# Altium PCB led_project.PcbDoc (part 2 of 2)
Units mm, origin at the board's own origin, x right, y up, seen from the top; angles counter-clockwise.
Board outline 347.39 x 342.47 mm, 2 copper layers (Top Layer 1, Bottom Layer 1); 228 components, 175 nets, 826 pads, 0 vias.
Unrouted connection lines stored in the file: 396.
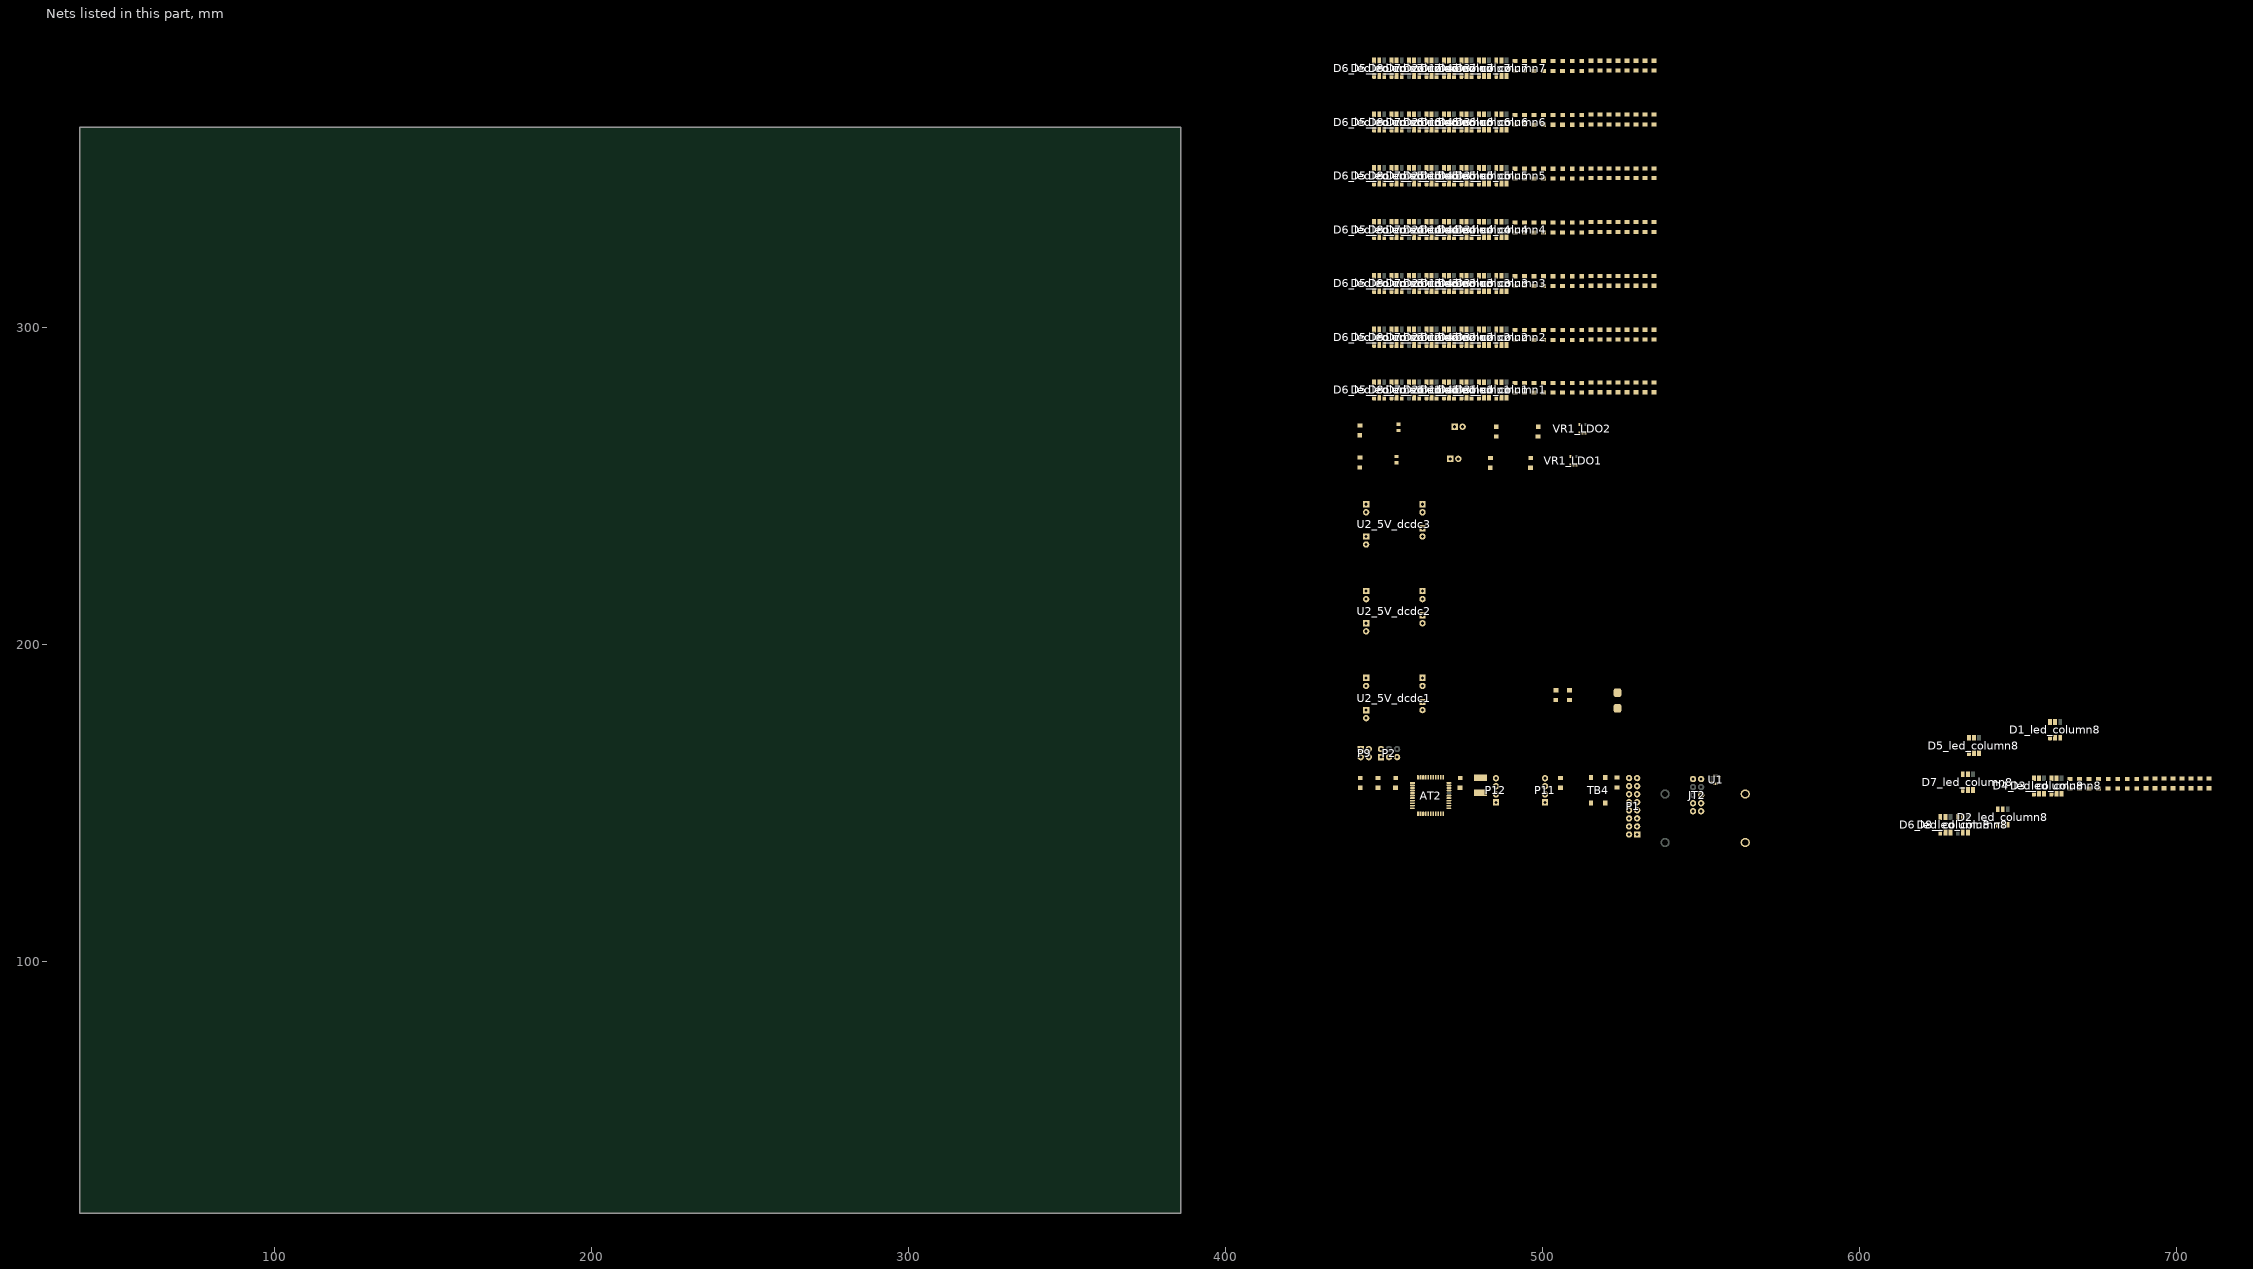
[diagram p2: the nets of this part, all layers, seen from the top]

## Part data
AT2: "ATmega644PA - Small but big and PicoPower", Farnell=2484915
J1 J2: library part "Banana conn", "Banana Connector 571-0100", Manufacturer_Name=Deltron, Mouser Part Number=164-6218, Datasheet Link=https://www.dem-uk.com/deltron-components/Data/Product_Downloads/deltron-571-0100-4mm-90deg-single-socket-data.pdf, Height=12.4mm, Manufacturer_Part_Number=571-0100, Mouser Price/Stock=https://www.mouser.com/Search/Refine.aspx?Keyword=164-6218
JT2: library part "Atmel JTAG", "Atmel JTAG Connector"
P1: "2.54 mm"
P10_LDO1 P10_LDO2: "2.54 mm, TH"
P11 P12: library part "1x4 Pin Header", "2.54 mm"
R1 R9_LDO1 R9_LDO2 R10_led_column1 R10_led_column2 R10_led_column3 R10_led_column4 R10_led_column5 R10_led_column6 R10_led_column7 R10_led_column8 R11_led_column1 R11_led_column2 R11_led_column3 R11_led_column4 R11_led_column5 R11_led_column6 R11_led_column7 R11_led_column8 R12_led_column1 R12_led_column2 R12_led_column3 R12_led_column4 R12_led_column5 R12_led_column6 R12_led_column7 R12_led_column8 R13_led_column1 R13_led_column2 R13_led_column3 R13_led_column4 R13_led_column5 R13_led_column6 R13_led_column7 R13_led_column8 R14_led_column1 R14_led_column2 R14_led_column3 R14_led_column4 R14_led_column5 R14_led_column6 R14_led_column7 R14_led_column8 R15_led_column1 R15_led_column2 R15_led_column3 R15_led_column4 R15_led_column5 R15_led_column6 R15_led_column7 R15_led_column8 R16_led_column1 R16_led_column2 R16_led_column3 R16_led_column4 R16_led_column5 R16_led_column6 R16_led_column7 R16_led_column8 R17_led_column1 R17_led_column2 R17_led_column3 R17_led_column4 R17_led_column5 R17_led_column6 R17_led_column7 R17_led_column8: "Resistor"
TB4: library part "Button SMD", "Tactile Switch Small Low", ELFA=110-87-406
U1: "3-Axis, ±2 g/±4 g/±8 g/±16 g Ultralow / Power Digital MEMS Accelerometer"
VR1_LDO1 VR1_LDO2: library part TPS79333DBR, "3.3V Reg, Ultra-Low Noise, 200 mA", Input Voltage="Vin 6V (max)", Drop Out=102mV, Farnell=1287689
XT2: "16 MHz, SMD, 5mm x 3,2mm, 30 ppm", Farnell=1841946
D1_led_column1 D1_led_column2 D1_led_column3 D1_led_column4 D1_led_column5 D1_led_column6 D1_led_column7 D1_led_column8 D2_led_column1 D2_led_column2 D2_led_column3 D2_led_column4 D2_led_column5 D2_led_column6 D2_led_column7 D2_led_column8 D3_led_column1 D3_led_column2 D3_led_column3 D3_led_column4 D3_led_column5 D3_led_column6 D3_led_column7 D3_led_column8 D4_led_column1 D4_led_column2 D4_led_column3 D4_led_column4 D4_led_column5 D4_led_column6 D4_led_column7 D4_led_column8 D5_led_column1 D5_led_column2 D5_led_column3 D5_led_column4 D5_led_column5 D5_led_column6 D5_led_column7 D5_led_column8 D6_led_column1 D6_led_column2 D6_led_column3 D6_led_column4 D6_led_column5 D6_led_column6 D6_led_column7 D6_led_column8 D7_led_column1 D7_led_column2 D7_led_column3 D7_led_column4 D7_led_column5 D7_led_column6 D7_led_column7 D7_led_column8 D8_led_column1 D8_led_column2 D8_led_column3 D8_led_column4 D8_led_column5 D8_led_column6 D8_led_column7 D8_led_column8: DigiKey=1568-1800-ND

## Nets (pads, with @x,y where several pads share a name; then routed paths per layer and width w, separated by ;. In a path a pad name is that pad's centre, name@x,y a point inside that pad or via, vN(x,y) a via of type N, cw(c..) or ccw(c..) an arc to the next point about the centre after c; other vN are vias at no path point)
3V3: C14.1 C15.1 C16.1 JT2.4
3V3_MCU: AT2.5 AT2.17 AT2.38 L2.1 P9.4 R1.0
3V3_MISC: P9.3 U1.14
3V3out1: C18_LDO1.1 LED1_LDO1.1 P9.1 VR1_LDO1.5
3V3out2: C18_LDO2.1 LED1_LDO2.1 P9.2 VR1_LDO2.5
5V_led: D1_led_column1.5 D1_led_column2.5 D1_led_column3.5 D1_led_column4.5 D1_led_column5.5 D1_led_column6.5 D1_led_column7.5 D1_led_column8.5 D2_led_column1.5 D2_led_column2.5 D2_led_column3.5 D2_led_column4.5 D2_led_column5.5 D2_led_column6.5 D2_led_column7.5 D2_led_column8.5 D3_led_column1.5 D3_led_column2.5 D3_led_column3.5 D3_led_column4.5 D3_led_column5.5 D3_led_column6.5 D3_led_column7.5 D3_led_column8.5 D4_led_column1.5 D4_led_column2.5 D4_led_column3.5 D4_led_column4.5 D4_led_column5.5 D4_led_column6.5 D4_led_column7.5 D4_led_column8.5 D5_led_column1.5 D5_led_column2.5 D5_led_column3.5 D5_led_column4.5 D5_led_column5.5 D5_led_column6.5 D5_led_column7.5 D5_led_column8.5 D6_led_column1.5 D6_led_column2.5 D6_led_column3.5 D6_led_column4.5 D6_led_column5.5 D6_led_column6.5 D6_led_column7.5 D6_led_column8.5 D7_led_column1.5 D7_led_column2.5 D7_led_column3.5 D7_led_column4.5 D7_led_column5.5 D7_led_column6.5 D7_led_column7.5 D7_led_column8.5 D8_led_column1.5 D8_led_column2.5 D8_led_column3.5 D8_led_column4.5 D8_led_column5.5 D8_led_column6.5 D8_led_column7.5 D8_led_column8.5 R10_led_column1.1 R10_led_column2.1 R10_led_column3.1 R10_led_column4.1 R10_led_column5.1 R10_led_column6.1 R10_led_column7.1 R10_led_column8.1 R11_led_column1.1 R11_led_column2.1 R11_led_column3.1 R11_led_column4.1 R11_led_column5.1 R11_led_column6.1 R11_led_column7.1 R11_led_column8.1 R12_led_column1.1 R12_led_column2.1 R12_led_column3.1 R12_led_column4.1 R12_led_column5.1 R12_led_column6.1 R12_led_column7.1 R12_led_column8.1 R13_led_column1.1 R13_led_column2.1 R13_led_column3.1 R13_led_column4.1 R13_led_column5.1 R13_led_column6.1 R13_led_column7.1 R13_led_column8.1 R14_led_column1.1 R14_led_column2.1 R14_led_column3.1 R14_led_column4.1 R14_led_column5.1 R14_led_column6.1 R14_led_column7.1 R14_led_column8.1 R15_led_column1.1 R15_led_column2.1 R15_led_column3.1 R15_led_column4.1 R15_led_column5.1 R15_led_column6.1 R15_led_column7.1 R15_led_column8.1 R16_led_column1.1 R16_led_column2.1 R16_led_column3.1 R16_led_column4.1 R16_led_column5.1 R16_led_column6.1 R16_led_column7.1 R16_led_column8.1 R17_led_column1.1 R17_led_column2.1 R17_led_column3.1 R17_led_column4.1 R17_led_column5.1 R17_led_column6.1 R17_led_column7.1 R17_led_column8.1
5V_led1: P1.1 P1.2 P1.3
5V_led2: P1.4 P1.5 P1.6
5V_led3: P1.7 P1.8
5Vout1: P1.9 P1.10 P2.1 U2_5V_dcdc1.3
5Vout2: P1.11 P1.12 P1.13 P2.2 U2_5V_dcdc2.3
5Vout3: P1.14 P1.15 P1.16 P2.3 U2_5V_dcdc3.3
AVCC: AT2.27 C13.1 L2.2
CS: AT2.44 U1.8
Din1: AT2.43 D1_led_column1.2
Din2: AT2.42 D1_led_column2.2
Din3: AT2.41 D1_led_column3.2
Din4: AT2.40 D1_led_column4.2
Din5: AT2.26 D1_led_column5.2
Din6: AT2.25 D1_led_column6.2
Din7: AT2.19 D1_led_column7.2
Din8: AT2.20 D1_led_column8.2
GND: AT2.6 AT2.18 AT2.28 AT2.39 C1.0 C2.0 C12.0 C13.0 C14.0 C15.0 C16.0 C17_LDO1.0 C17_LDO2.0 C18_LDO1.0 C18_LDO2.0 C19_led_column1.0 C19_led_column2.0 C19_led_column3.0 C19_led_column4.0 C19_led_column5.0 C19_led_column6.0 C19_led_column7.0 C19_led_column8.0 C20_led_column1.0 C20_led_column2.0 C20_led_column3.0 C20_led_column4.0 C20_led_column5.0 C20_led_column6.0 C20_led_column7.0 C20_led_column8.0 C21_led_column1.0 C21_led_column2.0 C21_led_column3.0 C21_led_column4.0 C21_led_column5.0 C21_led_column6.0 C21_led_column7.0 C21_led_column8.0 C22_led_column1.0 C22_led_column2.0 C22_led_column3.0 C22_led_column4.0 C22_led_column5.0 C22_led_column6.0 C22_led_column7.0 C22_led_column8.0 C23_led_column1.0 C23_led_column2.0 C23_led_column3.0 C23_led_column4.0 C23_led_column5.0 C23_led_column6.0 C23_led_column7.0 C23_led_column8.0 C24_led_column1.0 C24_led_column2.0 C24_led_column3.0 C24_led_column4.0 C24_led_column5.0 C24_led_column6.0 C24_led_column7.0 C24_led_column8.0 C25_led_column1.0 C25_led_column2.0 C25_led_column3.0 C25_led_column4.0 C25_led_column5.0 C25_led_column6.0 C25_led_column7.0 C25_led_column8.0 C26_led_column1.0 C26_led_column2.0 C26_led_column3.0 C26_led_column4.0 C26_led_column5.0 C26_led_column6.0 C26_led_column7.0 C26_led_column8.0 D1_led_column1.6 D1_led_column2.6 D1_led_column3.6 D1_led_column4.6 D1_led_column5.6 D1_led_column6.6 D1_led_column7.6 D1_led_column8.6 D2_led_column1.6 D2_led_column2.6 D2_led_column3.6 D2_led_column4.6 D2_led_column5.6 D2_led_column6.6 D2_led_column7.6 D2_led_column8.6 D3_led_column1.6 D3_led_column2.6 D3_led_column3.6 D3_led_column4.6 D3_led_column5.6 D3_led_column6.6 D3_led_column7.6 D3_led_column8.6 D4_led_column1.6 D4_led_column2.6 D4_led_column3.6 D4_led_column4.6 D4_led_column5.6 D4_led_column6.6 D4_led_column7.6 D4_led_column8.6 D5_led_column1.6 D5_led_column2.6 D5_led_column3.6 D5_led_column4.6 D5_led_column5.6 D5_led_column6.6 D5_led_column7.6 D5_led_column8.6 D6_led_column1.6 D6_led_column2.6 D6_led_column3.6 D6_led_column4.6 D6_led_column5.6 D6_led_column6.6 D6_led_column7.6 D6_led_column8.6 D7_led_column1.6 D7_led_column2.6 D7_led_column3.6 D7_led_column4.6 D7_led_column5.6 D7_led_column6.6 D7_led_column7.6 D7_led_column8.6 D8_led_column1.6 D8_led_column2.6 D8_led_column3.6 D8_led_column4.6 D8_led_column5.6 D8_led_column6.6 D8_led_column7.6 D8_led_column8.6 JT2.2 JT2.10 R9_LDO1.1 R9_LDO2.1 TB4.1 TB4.3 U1.12 U1.13 U1.16 U2_5V_dcdc1.2 U2_5V_dcdc2.2 U2_5V_dcdc3.2 VR1_LDO1.2 VR1_LDO2.2
MISO: AT2.2 U1.7
MOSI: AT2.1 U1.6
NetAT2_7: AT2.7 C2.1 XT2.1
NetAT2_8: AT2.8 C12.1 XT2.2
NetC17_LDO1_1: C17_LDO1.1 P10_LDO1.2 VR1_LDO1.1 VR1_LDO1.3
NetC17_LDO2_1: C17_LDO2.1 P10_LDO2.2 VR1_LDO2.1 VR1_LDO2.3
NetC19_led_column1_1: C19_led_column1.1 D1_led_column1.3 R10_led_column1.0
NetC19_led_column2_1: C19_led_column2.1 D1_led_column2.3 R10_led_column2.0
NetC19_led_column3_1: C19_led_column3.1 D1_led_column3.3 R10_led_column3.0
NetC19_led_column4_1: C19_led_column4.1 D1_led_column4.3 R10_led_column4.0
NetC19_led_column5_1: C19_led_column5.1 D1_led_column5.3 R10_led_column5.0
NetC19_led_column6_1: C19_led_column6.1 D1_led_column6.3 R10_led_column6.0
NetC19_led_column7_1: C19_led_column7.1 D1_led_column7.3 R10_led_column7.0
NetC19_led_column8_1: C19_led_column8.1 D1_led_column8.3 R10_led_column8.0
NetC20_led_column1_1: C20_led_column1.1 D2_led_column1.3 R11_led_column1.0
NetC20_led_column2_1: C20_led_column2.1 D2_led_column2.3 R11_led_column2.0
NetC20_led_column3_1: C20_led_column3.1 D2_led_column3.3 R11_led_column3.0
NetC20_led_column4_1: C20_led_column4.1 D2_led_column4.3 R11_led_column4.0
NetC20_led_column5_1: C20_led_column5.1 D2_led_column5.3 R11_led_column5.0
NetC20_led_column6_1: C20_led_column6.1 D2_led_column6.3 R11_led_column6.0
NetC20_led_column7_1: C20_led_column7.1 D2_led_column7.3 R11_led_column7.0
NetC20_led_column8_1: C20_led_column8.1 D2_led_column8.3 R11_led_column8.0
NetC21_led_column1_1: C21_led_column1.1 D3_led_column1.3 R12_led_column1.0
NetC21_led_column2_1: C21_led_column2.1 D3_led_column2.3 R12_led_column2.0
NetC21_led_column3_1: C21_led_column3.1 D3_led_column3.3 R12_led_column3.0
NetC21_led_column4_1: C21_led_column4.1 D3_led_column4.3 R12_led_column4.0
NetC21_led_column5_1: C21_led_column5.1 D3_led_column5.3 R12_led_column5.0
NetC21_led_column6_1: C21_led_column6.1 D3_led_column6.3 R12_led_column6.0
NetC21_led_column7_1: C21_led_column7.1 D3_led_column7.3 R12_led_column7.0
NetC21_led_column8_1: C21_led_column8.1 D3_led_column8.3 R12_led_column8.0
NetC22_led_column1_1: C22_led_column1.1 D4_led_column1.3 R13_led_column1.0
NetC22_led_column2_1: C22_led_column2.1 D4_led_column2.3 R13_led_column2.0
NetC22_led_column3_1: C22_led_column3.1 D4_led_column3.3 R13_led_column3.0
NetC22_led_column4_1: C22_led_column4.1 D4_led_column4.3 R13_led_column4.0
NetC22_led_column5_1: C22_led_column5.1 D4_led_column5.3 R13_led_column5.0
NetC22_led_column6_1: C22_led_column6.1 D4_led_column6.3 R13_led_column6.0
NetC22_led_column7_1: C22_led_column7.1 D4_led_column7.3 R13_led_column7.0
NetC22_led_column8_1: C22_led_column8.1 D4_led_column8.3 R13_led_column8.0
NetC23_led_column1_1: C23_led_column1.1 D5_led_column1.3 R14_led_column1.0
NetC23_led_column2_1: C23_led_column2.1 D5_led_column2.3 R14_led_column2.0
NetC23_led_column3_1: C23_led_column3.1 D5_led_column3.3 R14_led_column3.0
NetC23_led_column4_1: C23_led_column4.1 D5_led_column4.3 R14_led_column4.0
NetC23_led_column5_1: C23_led_column5.1 D5_led_column5.3 R14_led_column5.0
NetC23_led_column6_1: C23_led_column6.1 D5_led_column6.3 R14_led_column6.0
NetC23_led_column7_1: C23_led_column7.1 D5_led_column7.3 R14_led_column7.0
NetC23_led_column8_1: C23_led_column8.1 D5_led_column8.3 R14_led_column8.0
NetC24_led_column1_1: C24_led_column1.1 D6_led_column1.3 R15_led_column1.0
NetC24_led_column2_1: C24_led_column2.1 D6_led_column2.3 R15_led_column2.0
NetC24_led_column3_1: C24_led_column3.1 D6_led_column3.3 R15_led_column3.0
NetC24_led_column4_1: C24_led_column4.1 D6_led_column4.3 R15_led_column4.0
NetC24_led_column5_1: C24_led_column5.1 D6_led_column5.3 R15_led_column5.0
NetC24_led_column6_1: C24_led_column6.1 D6_led_column6.3 R15_led_column6.0
NetC24_led_column7_1: C24_led_column7.1 D6_led_column7.3 R15_led_column7.0
NetC24_led_column8_1: C24_led_column8.1 D6_led_column8.3 R15_led_column8.0
NetC25_led_column1_1: C25_led_column1.1 D7_led_column1.3 R16_led_column1.0
NetC25_led_column2_1: C25_led_column2.1 D7_led_column2.3 R16_led_column2.0
NetC25_led_column3_1: C25_led_column3.1 D7_led_column3.3 R16_led_column3.0
NetC25_led_column4_1: C25_led_column4.1 D7_led_column4.3 R16_led_column4.0
NetC25_led_column5_1: C25_led_column5.1 D7_led_column5.3 R16_led_column5.0
NetC25_led_column6_1: C25_led_column6.1 D7_led_column6.3 R16_led_column6.0
NetC25_led_column7_1: C25_led_column7.1 D7_led_column7.3 R16_led_column7.0
NetC25_led_column8_1: C25_led_column8.1 D7_led_column8.3 R16_led_column8.0
NetC26_led_column1_1: C26_led_column1.1 D8_led_column1.3 R17_led_column1.0
NetC26_led_column2_1: C26_led_column2.1 D8_led_column2.3 R17_led_column2.0
NetC26_led_column3_1: C26_led_column3.1 D8_led_column3.3 R17_led_column3.0
NetC26_led_column4_1: C26_led_column4.1 D8_led_column4.3 R17_led_column4.0
NetC26_led_column5_1: C26_led_column5.1 D8_led_column5.3 R17_led_column5.0
NetC26_led_column6_1: C26_led_column6.1 D8_led_column6.3 R17_led_column6.0
NetC26_led_column7_1: C26_led_column7.1 D8_led_column7.3 R17_led_column7.0
NetC26_led_column8_1: C26_led_column8.1 D8_led_column8.3 R17_led_column8.0
NetD1_led_column1_1: D1_led_column1.1 D2_led_column1.2
NetD1_led_column2_1: D1_led_column2.1 D2_led_column2.2
NetD1_led_column3_1: D1_led_column3.1 D2_led_column3.2
NetD1_led_column4_1: D1_led_column4.1 D2_led_column4.2
NetD1_led_column5_1: D1_led_column5.1 D2_led_column5.2
NetD1_led_column6_1: D1_led_column6.1 D2_led_column6.2
NetD1_led_column7_1: D1_led_column7.1 D2_led_column7.2
NetD1_led_column8_1: D1_led_column8.1 D2_led_column8.2
NetD2_led_column1_1: D2_led_column1.1 D3_led_column1.2
NetD2_led_column2_1: D2_led_column2.1 D3_led_column2.2
NetD2_led_column3_1: D2_led_column3.1 D3_led_column3.2
NetD2_led_column4_1: D2_led_column4.1 D3_led_column4.2
NetD2_led_column5_1: D2_led_column5.1 D3_led_column5.2
NetD2_led_column6_1: D2_led_column6.1 D3_led_column6.2
NetD2_led_column7_1: D2_led_column7.1 D3_led_column7.2
NetD2_led_column8_1: D2_led_column8.1 D3_led_column8.2
NetD3_led_column1_1: D3_led_column1.1 D4_led_column1.2
NetD3_led_column2_1: D3_led_column2.1 D4_led_column2.2
NetD3_led_column3_1: D3_led_column3.1 D4_led_column3.2
NetD3_led_column4_1: D3_led_column4.1 D4_led_column4.2
NetD3_led_column5_1: D3_led_column5.1 D4_led_column5.2
NetD3_led_column6_1: D3_led_column6.1 D4_led_column6.2
NetD3_led_column7_1: D3_led_column7.1 D4_led_column7.2
NetD3_led_column8_1: D3_led_column8.1 D4_led_column8.2
NetD4_led_column1_1: D4_led_column1.1 D5_led_column1.2
NetD4_led_column2_1: D4_led_column2.1 D5_led_column2.2
NetD4_led_column3_1: D4_led_column3.1 D5_led_column3.2
NetD4_led_column4_1: D4_led_column4.1 D5_led_column4.2
NetD4_led_column5_1: D4_led_column5.1 D5_led_column5.2
NetD4_led_column6_1: D4_led_column6.1 D5_led_column6.2
NetD4_led_column7_1: D4_led_column7.1 D5_led_column7.2
NetD4_led_column8_1: D4_led_column8.1 D5_led_column8.2
NetD5_led_column1_1: D5_led_column1.1 D6_led_column1.2
NetD5_led_column2_1: D5_led_column2.1 D6_led_column2.2
NetD5_led_column3_1: D5_led_column3.1 D6_led_column3.2
NetD5_led_column4_1: D5_led_column4.1 D6_led_column4.2
NetD5_led_column5_1: D5_led_column5.1 D6_led_column5.2
NetD5_led_column6_1: D5_led_column6.1 D6_led_column6.2
NetD5_led_column7_1: D5_led_column7.1 D6_led_column7.2
NetD5_led_column8_1: D5_led_column8.1 D6_led_column8.2
NetD6_led_column1_1: D6_led_column1.1 D7_led_column1.2
NetD6_led_column2_1: D6_led_column2.1 D7_led_column2.2
NetD6_led_column3_1: D6_led_column3.1 D7_led_column3.2
NetD6_led_column4_1: D6_led_column4.1 D7_led_column4.2
NetD6_led_column5_1: D6_led_column5.1 D7_led_column5.2
NetD6_led_column6_1: D6_led_column6.1 D7_led_column6.2
NetD6_led_column7_1: D6_led_column7.1 D7_led_column7.2
NetD6_led_column8_1: D6_led_column8.1 D7_led_column8.2
NetD7_led_column1_1: D7_led_column1.1 D8_led_column1.2
NetD7_led_column2_1: D7_led_column2.1 D8_led_column2.2
NetD7_led_column3_1: D7_led_column3.1 D8_led_column3.2
NetD7_led_column4_1: D7_led_column4.1 D8_led_column4.2
NetD7_led_column5_1: D7_led_column5.1 D8_led_column5.2
NetD7_led_column6_1: D7_led_column6.1 D8_led_column6.2
NetD7_led_column7_1: D7_led_column7.1 D8_led_column7.2
NetD7_led_column8_1: D7_led_column8.1 D8_led_column8.2
NetJ1_1: J1.1 U2_5V_dcdc1.1 U2_5V_dcdc2.1 U2_5V_dcdc3.1
NetLED1_LDO1_0: LED1_LDO1.0 R9_LDO1.0
NetLED1_LDO2_0: LED1_LDO2.0 R9_LDO2.0
NetP2_6: P2.6 P10_LDO1.1 P10_LDO2.1
PA0: AT2.37 P11.1
PA1: AT2.36 P11.2
PA2: AT2.35 P11.3
PA3: AT2.34 P11.4
PA4: AT2.33 P12.1
PA5: AT2.32 P12.2
PA6: AT2.31 P12.3
PA7: AT2.30 P12.4
PD0: AT2.9
PD1: AT2.10
PD2: AT2.11
PD3: AT2.12
PD4: AT2.13
PD5: AT2.14
PD6: AT2.15
PD7: AT2.16
R\S\T\: AT2.4 C1.1 R1.1 TB4.2 TB4.4
SCK: AT2.3 U1.4
TCK: AT2.21 JT2.1
TDI: AT2.24 JT2.9
TDO: AT2.23 JT2.3
TMS: AT2.22 JT2.5
pads on no net: AT2.29 D1_led_column1.4 D1_led_column2.4 D1_led_column3.4 D1_led_column4.4 D1_led_column5.4 D1_led_column6.4 D1_led_column7.4 D1_led_column8.4 D2_led_column1.4 D2_led_column2.4 D2_led_column3.4 D2_led_column4.4 D2_led_column5.4 D2_led_column6.4 D2_led_column7.4 D2_led_column8.4 D3_led_column1.4 D3_led_column2.4 D3_led_column3.4 D3_led_column4.4 D3_led_column5.4 D3_led_column6.4 D3_led_column7.4 D3_led_column8.4 D4_led_column1.4 D4_led_column2.4 D4_led_column3.4 D4_led_column4.4 D4_led_column5.4 D4_led_column6.4 D4_led_column7.4 D4_led_column8.4 D5_led_column1.4 D5_led_column2.4 D5_led_column3.4 D5_led_column4.4 D5_led_column5.4 D5_led_column6.4 D5_led_column7.4 D5_led_column8.4 D6_led_column1.4 D6_led_column2.4 D6_led_column3.4 D6_led_column4.4 D6_led_column5.4 D6_led_column6.4 D6_led_column7.4 D6_led_column8.4 D7_led_column1.4 D7_led_column2.4 D7_led_column3.4 D7_led_column4.4 D7_led_column5.4 D7_led_column6.4 D7_led_column7.4 D7_led_column8.4 D8_led_column1.1 D8_led_column1.4 D8_led_column2.1 D8_led_column2.4 D8_led_column3.1 D8_led_column3.4 D8_led_column4.1 D8_led_column4.4 D8_led_column5.1 D8_led_column5.4 D8_led_column6.1 D8_led_column6.4 D8_led_column7.1 D8_led_column7.4 D8_led_column8.1 D8_led_column8.4 J2.1 JT2.6 JT2.7 JT2.8 P2.4 P2.5 U1.1 U1.2 U1.3 U1.5 U1.9 U1.10 U1.11 U1.15 VR1_LDO1.4 VR1_LDO2.4